# EAGLE board CAN2matrix (EAGLE 6.1)
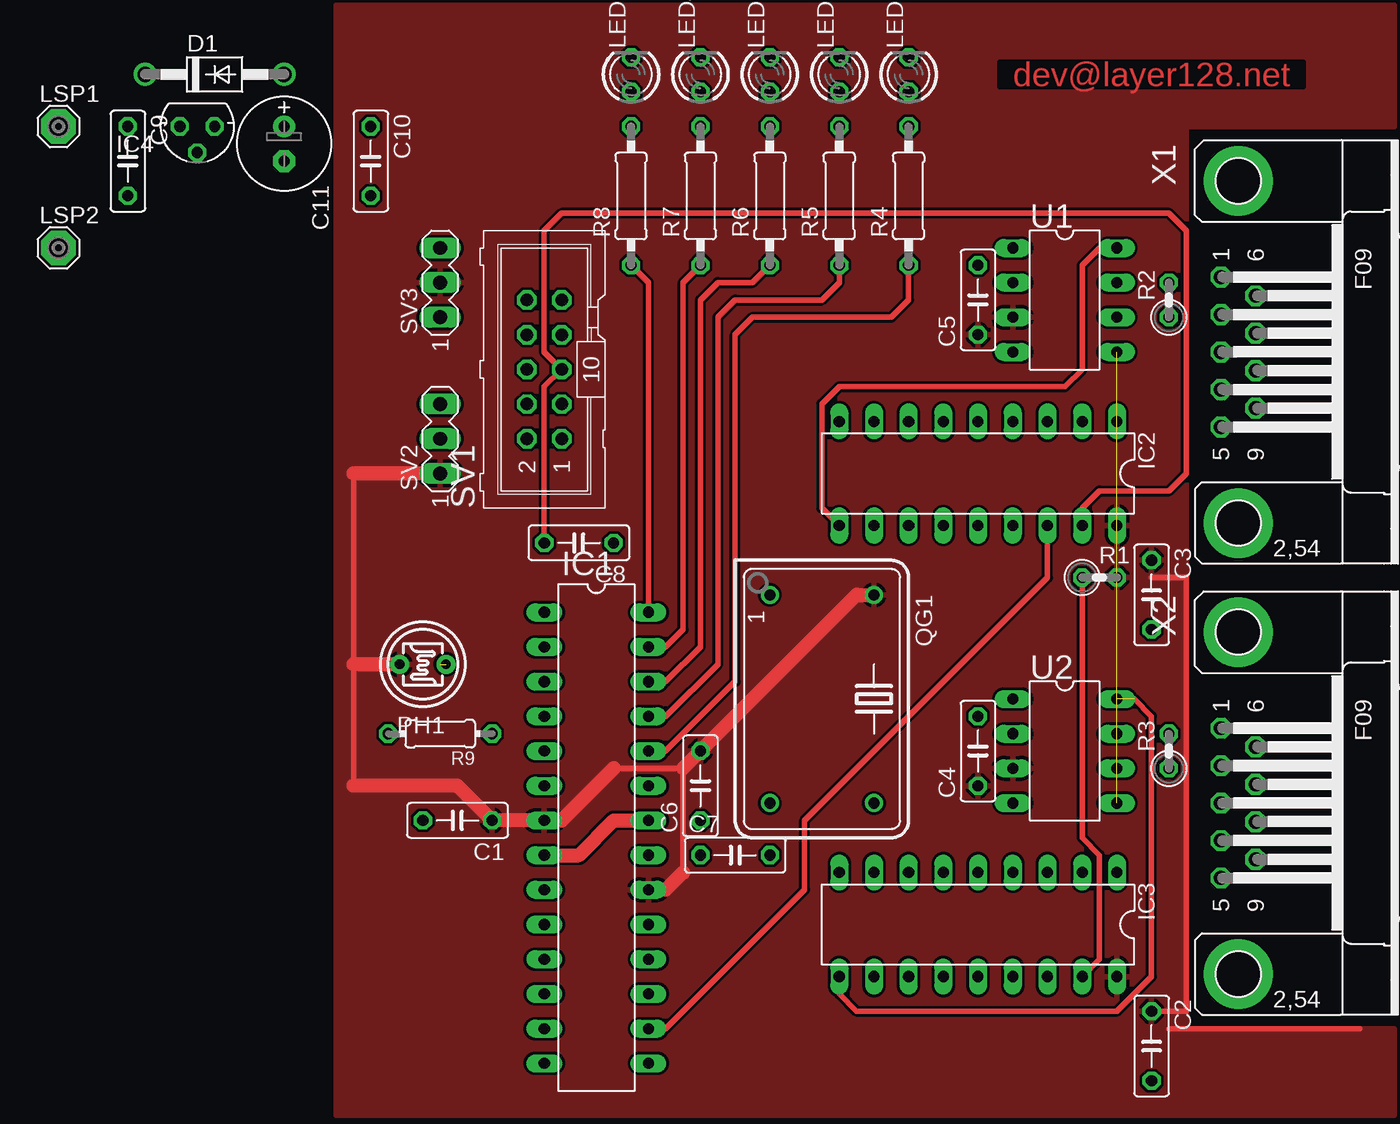
[diagram p0: board, top side]
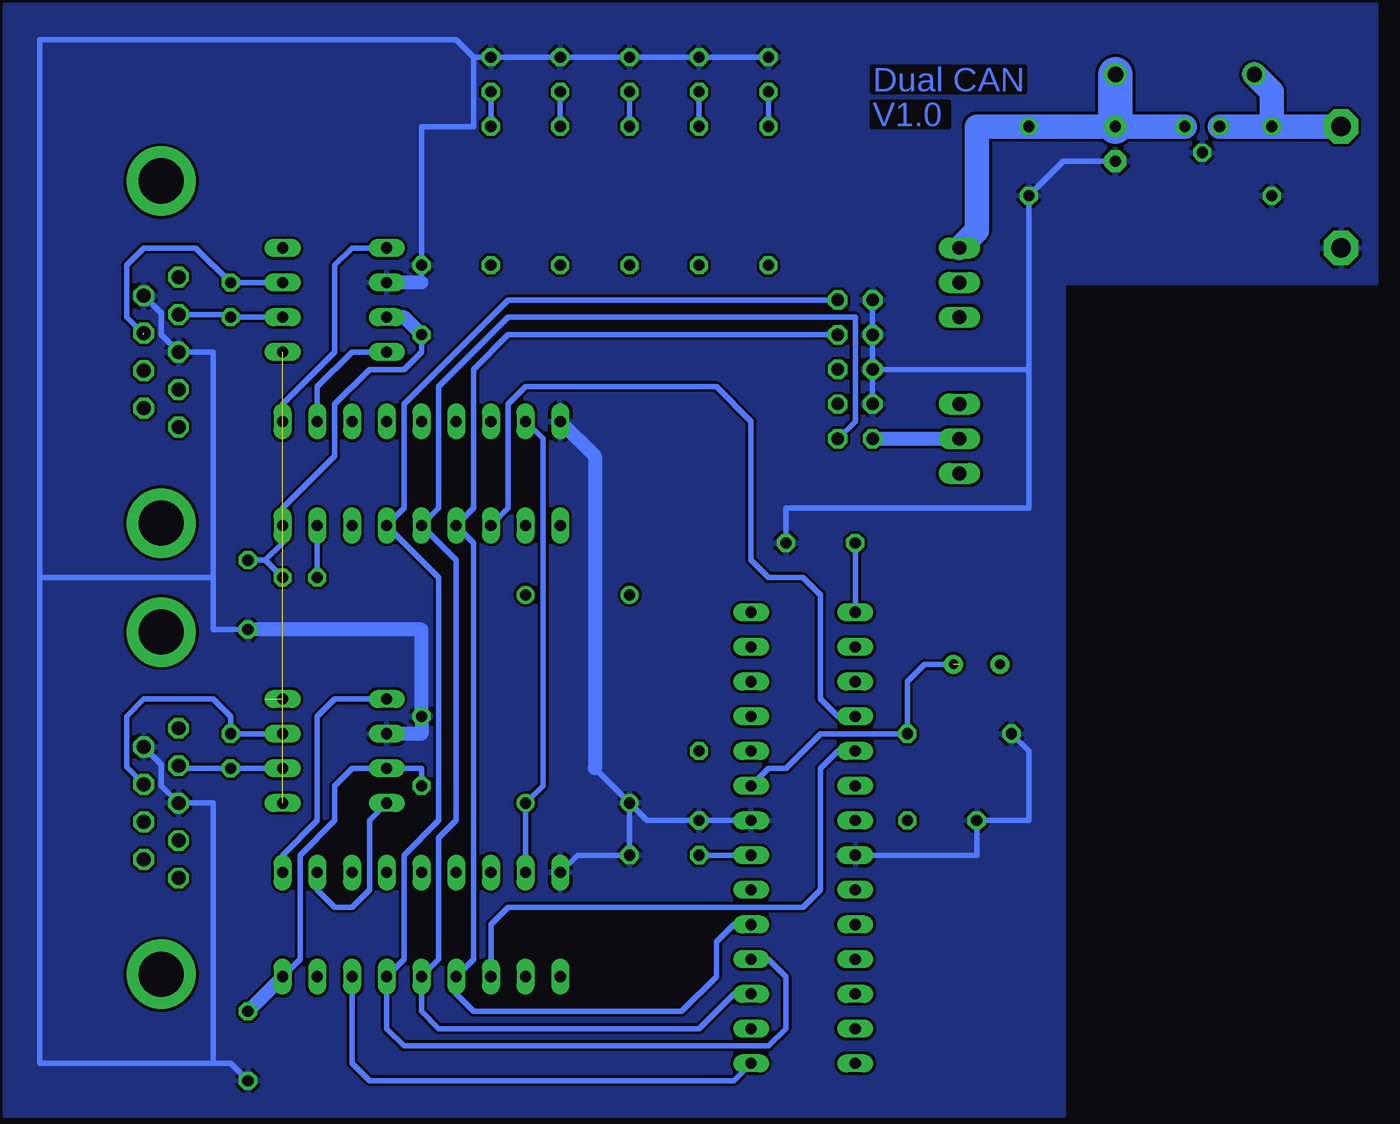
[diagram p1: board, bottom side, seen from below]

No outline drawn. Coordinates in mm, seen from the top.
Copper layers (1*16): Top 0.035mm / dielectric 1.5mm / Bottom 0.035mm
Design rules: minimum track width 10mil, minimum drill 24mil, track to track 8mil, track to pad 8mil, pad to pad 8mil, via to via 8mil, smd to smd 8mil, copper to edge 40mil, drill to drill 8mil, minimum pad ring 10mil, minimum via ring 8mil, stop-mask expansion 4mil, vias tented up to drill 0mil, thermal gap 10mil

## Footprints (pad centres in the part's own frame; a part is rotated, then mirrored left to right if it is on the bottom)
C050-025X075 = drill 0.813 octagon: 1 -2.54,0; 2 2.54,0
E2,5-7 = drill 0.813 pad 1.6: + -1.27,0 | drill 0.813 pad 1.6 octagon: - 1.27,0
DO41-10 = drill 1.118: A 5.08,0; C -5.08,0
DIL28-3 = drill 0.813 long: 1 -16.51,-3.81; 2 -13.97,-3.81; 3 -11.43,-3.81; 4 -8.89,-3.81; 5 -6.35,-3.81; 6 -3.81,-3.81; 7 -1.27,-3.81; 8 1.27,-3.81; 9 3.81,-3.81; 10 6.35,-3.81; 11 8.89,-3.81; 12 11.43,-3.81; 13 13.97,-3.81; 14 16.51,-3.81; 15 16.51,3.81; 16 13.97,3.81; 17 11.43,3.81; 18 8.89,3.81; 19 6.35,3.81; 20 3.81,3.81; 21 1.27,3.81; 22 -1.27,3.81; 23 -3.81,3.81; 24 -6.35,3.81; 25 -8.89,3.81; 26 -11.43,3.81; 27 -13.97,3.81; 28 -16.51,3.81
DIL18 = drill 0.813 long: 1 -10.16,-3.81; 2 -7.62,-3.81; 3 -5.08,-3.81; 4 -2.54,-3.81; 5 0,-3.81; 6 2.54,-3.81; 7 5.08,-3.81; 8 7.62,-3.81; 9 10.16,-3.81; 10 10.16,3.81; 11 7.62,3.81; 12 5.08,3.81; 13 2.54,3.81; 14 0,3.81; 15 -2.54,3.81; 16 -5.08,3.81; 17 -7.62,3.81; 18 -10.16,3.81
78LXX = drill 0.813 octagon: GND 0,1.905; IN 1.27,0; OUT -1.27,0
LED3MM = drill 0.813 octagon: A -1.27,0; K 1.27,0
SE14 = drill 1.397 pad 2.54 octagon: MP 0,0
T0-46-A10XX = drill 0.7 pad 1.4: 1 -1.7,0; 2 1.7,0
DIL14S = drill 0.813: 1 -7.62,-3.81; 7 7.62,-3.81; 8 7.62,3.81; 14 -7.62,3.81
0207/2V = drill 0.813 octagon: 1 -1.27,0; 2 1.27,0
0207/10 = drill 0.813 octagon: 1 -5.08,0; 2 5.08,0
0204/7 = drill 0.813 octagon: 1 -3.81,0; 2 3.81,0
ML10 = drill 0.914 octagon: 1 -5.08,-1.27; 2 -5.08,1.27; 3 -2.54,-1.27; 4 -2.54,1.27; 5 0,-1.27; 6 0,1.27; 7 2.54,-1.27; 8 2.54,1.27; 9 5.08,-1.27; 10 5.08,1.27
MA03-1 = drill 1.016 long: 1 -2.54,0; 2 0,0; 3 2.54,0
DIL8 = drill 0.813 long: 1 -3.81,-3.81; 2 -1.27,-3.81; 3 1.27,-3.81; 4 3.81,-3.81; 5 3.81,3.81; 6 1.27,3.81; 7 -1.27,3.81; 8 -3.81,3.81
F09HP = drill 1.016 octagon: 1 -5.486,-1.27; 2 -2.743,-1.27; 3 0,-1.27; 4 2.743,-1.27; 5 5.486,-1.27; 6 -4.115,1.27; 7 -1.372,1.27; 8 1.372,1.27; 9 4.115,1.27 | drill 3.302 pad 5.08: G1 -12.522,0; G2 12.522,0

## Placement (x,y rotation side)
C1  100n  [C050-025X075]  31.75,21.59 180 top
C2  100n  [C050-025X075]  82.55,5.08 270 top
C3  100n  [C050-025X075]  82.55,38.1 270 top
C4  100n  [C050-025X075]  69.85,26.67 90 top
C5  100n  [C050-025X075]  69.85,59.69 90 top
C6  100n  [C050-025X075]  49.53,24.13 90 top
C7  100n  [C050-025X075]  52.07,19.05 0 top
C8  47n  [C050-025X075]  40.64,41.91 180 top
C9  330n  [C050-025X075]  7.62,69.85 270 top
C10  100n  [C050-025X075]  25.4,69.85 270 top
C11  1µ  [E2,5-7]  19.05,71.12 270 top
D1  1N4002  [DO41-10]  13.97,76.2 0 top
IC1  MEGA8-P  [DIL28-3]  41.91,20.32 270 top
IC2  MCP2515-E/P  [DIL18]  69.85,46.99 180 top
IC3  MCP2515-E/P  [DIL18]  69.85,13.97 180 top
IC4  [78LXX]  12.7,72.39 180 top
LED1  red  [LED3MM]  64.77,76.2 90 top
LED2  red  [LED3MM]  59.69,76.2 90 top
LED3  green  [LED3MM]  54.61,76.2 90 top
LED4  green  [LED3MM]  49.53,76.2 90 top
LED5  yellow  [LED3MM]  44.45,76.2 90 top
LSP1  +12V  [SE14]  2.54,72.39 0 top
LSP2  SE14  [SE14]  2.54,63.5 0 top
PH1  A1050_09  [T0-46-A10XX]  29.21,33.02 0 top
QG1  4.0000Mhz  [DIL14S]  58.42,30.48 270 top
R1  10k  [0207/2V]  78.74,39.37 0 top
R2  120  [0207/2V]  83.82,59.69 90 top
R3  120  [0207/2V]  83.82,26.67 90 top
R4  1k  [0207/10]  64.77,67.31 90 top
R5  1k  [0207/10]  59.69,67.31 90 top
R6  1k  [0207/10]  54.61,67.31 90 top
R7  1k  [0207/10]  49.53,67.31 90 top
R8  1k  [0207/10]  44.45,67.31 90 top
R9  39k  [0204/7]  30.48,27.94 180 top
SV1  ISP (WSL10G)  [ML10]  38.1,54.61 90 top
SV2  USB Pwr  [MA03-1]  30.48,49.53 90 top
SV3  Ext Pwr  [MA03-1]  30.48,60.96 90 top
U1  MCP2551P  [DIL8]  76.2,59.69 270 top
U2  MCP2551P  [DIL8]  76.2,26.67 270 top
X1  CAN1  [F09HP]  88.9,55.88 270 top
X2  CAN2  [F09HP]  88.9,22.86 270 top

## Library data of the parts
C1-C11 R1-R9 = resistor
D1 = diode
IC1 = atmel; OC_FARNELL: unknown; OC_NEWARK: unknown
IC2 IC3 = mcp2515
IC4 = v-reg
LED1-LED5 = led
LSP1 LSP2 = solpad
PH1 = photo-elements
QG1 = crystal; OC_FARNELL: unknown; OC_NEWARK: unknown
SV1 = con-ml; OC_FARNELL: unknown; OC_NEWARK: unknown
SV2 SV3 = con-lstb; OC_FARNELL: unknown; OC_NEWARK: unknown
U1 U2 = microchip_can
X1 X2 = con-subd; OC_FARNELL: unknown; OC_NEWARK: unknown

## Nets
+5V: C1.1 C2.1 C3.1 C4.1 C5.1 C6.2 IC1.7 IC1.20 IC2.18 IC3.18 PH1.1 QG1.14 R1.2 SV2.1 SV3.2 U1.3 U2.3
+12V: C9.1 D1.C IC4.IN LSP1.MP
GND: C1.2 C2.2 C3.2 C4.2 C5.2 C6.1 C7.2 C8.1 C9.2 C10.2 C11.- IC1.8 IC1.22 IC2.9 IC3.9 IC4.GND LED1.K LED2.K LED3.K LED4.K LED5.K LSP2.MP QG1.7 R9.2 SV1.4 SV1.6 SV1.8 SV1.10 U1.2 U2.2 X1.3 X1.6 X2.3 X2.6
N$1: IC1.18 IC2.15 IC3.15 SV1.9
N$2: IC1.17 IC2.14 IC3.14 SV1.1
N$3: IC1.19 IC2.13 IC3.13 SV1.7
N$4: R2.2 U1.7 X1.7
N$5: R3.2 U2.7 X2.7
N$6: R3.1 U2.6 X2.2
N$7: IC3.10 U2.8
N$8: C7.1 IC1.21
N$9: C8.2 IC1.1 IC2.17 IC3.17 R1.1 SV1.5
N$10: IC2.1 U1.1
N$11: IC2.2 U1.4
N$12: IC3.1 U2.1
N$13: IC3.2 U2.4
N$14: IC1.16 IC2.16
N$15: IC1.15 IC3.16
N$16: IC1.4 IC2.12
N$17: IC1.5 IC3.12
N$18: IC2.8 IC3.8 QG1.8
N$19: IC2.10 U1.8
N$20: R2.1 U1.6 X1.2
N$21: SV1.2 SV2.2
N$22: IC1.24 R4.1
N$23: IC1.25 R5.1
N$24: IC1.26 R6.1
N$25: IC1.27 R7.1
N$26: IC1.28 R8.1
N$27: LED1.A R4.2
N$28: LED2.A R5.2
N$29: LED3.A R6.2
N$30: LED4.A R7.2
N$31: LED5.A R8.2
N$32: IC1.23 PH1.2 R9.1
N$33: C10.1 C11.+ D1.A IC4.OUT SV3.3
VREF: U1.5 U2.5

## Tracks (layer width: path | path; a pad name or v marks a point on that pad's centre or on a via)
+5V
  Top 0.406: IC1.7 39.37,21.59 | 43.18,25.4 48.26,25.4 48.26,17.78 | 97.79,6.35 83.82,6.35 | 24.13,24.13 24.13,33.02 24.13,46.99 | C2.1 85.09,7.62 85.09,39.37 82.55,39.37
  Top 1.016: 39.37,21.59 43.18,25.4 | 48.26,25.4 C6.2 60.96,38.1 QG1.14 | 48.26,17.78 46.99,16.51 IC1.20 | PH1.1 24.13,33.02 | SV2.1 24.13,46.99 | IC1.7 C1.1 31.75,24.13 24.13,24.13
  Bottom 0.406: C4.1 69.85,25.4 U2.3 74.93,25.4 76.2,24.13 76.2,21.59 78.74,19.05 78.74,11.43 IC3.18 | R1.2 81.28,40.64 | C3.1 81.28,40.64 | 81.28,40.64 80.01,41.91 IC2.18 80.01,44.45 76.2,48.26 76.2,52.07 73.66,54.61 71.12,54.61 69.85,55.88 C5.1
  Bottom 1.016: C2.1 IC3.18 | C5.1 71.12,58.42 U1.3
  pour Top: 22.86,0 22.86,81.28 100.33,81.28 100.33,72.39 85.09,72.39 85.09,6.35 100.33,6.35 100.33,0
+12V
  Bottom 1.778: LSP1.MP C9.1 | C9.1 7.62,74.93 D1.C | C9.1 IC4.IN
GND
  Top 1.016: IC1.8 40.64,19.05 43.18,21.59 IC1.22
  Bottom 0.406: IC1.22 C6.1 53.34,21.59 QG1.7 | X2.6 88.9,25.7 88.9,24.13 X2.3 85.09,22.86 85.09,3.81 | X1.6 88.9,58.73 88.9,57.15 X1.3 85.09,55.88 85.09,39.37 | 69.85,60.96 C5.2 69.85,72.39 66.04,72.39 66.04,77.47 | SV1.10 SV1.8 SV1.6 | 25.4,54.61 25.4,44.45 43.18,44.45 C8.1 | 25.4,54.61 SV1.6 | SV1.6 SV1.4 | IC1.8 29.21,19.05 C1.2 25.4,21.59 25.4,26.67 R9.2 | IC3.9 58.42,19.05 C7.2 QG1.7 | C2.2 83.82,3.81 85.09,3.81 | 85.09,3.81 97.79,3.81 97.79,39.37 | LED5.K LED4.K LED3.K LED2.K LED1.K 66.04,77.47 | 66.04,77.47 67.31,78.74 97.79,78.74 97.79,39.37 | 57.15,25.4 QG1.7 | 25.4,54.61 C10.2 22.86,69.85 C11.- | 85.09,39.37 97.79,39.37 | C3.2 85.09,35.56 85.09,39.37
  Bottom 1.016: 69.85,60.96 U1.2 | U2.2 69.85,27.94 C4.2 69.85,35.56 C3.2 | IC2.9 57.15,48.26 57.15,25.4
  pour Bottom: 22.86,81.28 22.86,0 100.33,0 100.33,81.28
  pour Bottom: 0,60.96 0,81.28 22.86,81.28 22.86,60.96
N$1
  Bottom 0.406: SV1.9 63.5,59.69 71.12,52.07 71.12,44.45 IC2.15 68.58,39.37 68.58,21.59 71.12,19.05 71.12,11.43 IC3.15 72.39,6.35 71.12,5.08 44.45,5.08 43.18,6.35 43.18,10.16 44.45,11.43 IC1.18
N$2
  Bottom 0.406: SV1.1 38.1,50.8 38.1,58.42 63.5,58.42 68.58,53.34 68.58,44.45 IC2.14 67.31,40.64 67.31,21.59 68.58,20.32 68.58,11.43 IC3.14 69.85,7.62 68.58,6.35 49.53,6.35 46.99,8.89 IC1.17
N$3
  Bottom 0.406: SV1.7 63.5,57.15 66.04,54.61 66.04,44.45 IC2.13 66.04,41.91 66.04,11.43 IC3.13 67.31,8.89 66.04,7.62 50.8,7.62 48.26,10.16 48.26,12.7 46.99,13.97 IC1.19
N$4  (1 unrouted)
  Bottom 0.406: U1.7 R2.2 86.36,63.5 90.17,63.5 91.44,62.23 91.44,58.42 90.17,57.15
N$5
  Bottom 0.406: U2.7 R3.2 83.82,29.21 85.09,30.48 90.17,30.48 91.44,29.21 91.44,25.5 X2.7
N$6
  Bottom 0.406: U2.6 R3.1 87.63,25.4 X2.2
N$7  (1 unrouted)
  Top 0.406: IC3.10 59.69,8.89 60.96,7.62 80.01,7.62 82.55,10.16 82.55,29.21 81.28,30.48
N$8
  Bottom 0.406: IC1.21 C7.1
N$9
  Top 0.406: C8.2 38.1,53.34 SV1.5 38.1,55.88 38.1,64.77 39.37,66.04 83.82,66.04 85.09,64.77 85.09,46.99 83.82,45.72 78.74,45.72 77.47,44.45 IC2.17 | IC3.17 78.74,11.43 78.74,19.05 77.47,20.32 R1.1
  Bottom 0.406: C8.2 IC1.1 | R1.1 IC2.17
N$10
  Bottom 0.406: IC2.1 80.01,52.07 76.2,55.88 76.2,62.23 74.93,63.5 U1.1
N$11
  Bottom 0.406: U1.4 74.93,55.88 77.47,53.34 IC2.2
N$12
  Bottom 0.406: IC3.1 80.01,19.05 77.47,21.59 77.47,29.21 76.2,30.48 U2.1
N$13
  Bottom 0.406: U2.4 73.66,21.59 73.66,16.51 74.93,15.24 76.2,15.24 77.47,16.51 IC3.2
N$14
  Top 0.406: IC1.16 46.99,6.35 57.15,16.51 57.15,21.59 74.93,39.37 IC2.16
N$15
  Bottom 0.406: IC1.15 46.99,2.54 73.66,2.54 74.93,3.81 IC3.16
N$16
  Bottom 0.406: IC1.4 39.37,29.21 40.64,30.48 40.64,38.1 41.91,39.37 44.45,39.37 45.72,40.64 45.72,50.8 48.26,53.34 62.23,53.34 63.5,52.07 63.5,44.45 IC2.12
N$17
  Bottom 0.406: IC1.5 39.37,26.67 40.64,25.4 40.64,16.51 41.91,15.24 63.5,15.24 64.77,13.97 IC3.12
N$18
  Bottom 0.406: IC3.8 QG1.8 60.96,24.13 60.96,49.53 IC2.8
N$19
  Top 0.406: IC2.10 58.42,44.45 58.42,52.07 59.69,53.34 76.2,53.34 77.47,54.61 77.47,62.23 78.74,63.5 U1.8
N$20
  Bottom 0.406: U1.6 R2.1 84.02,58.62 X1.2
N$21
  Bottom 1.016: SV1.2 SV2.2
N$22
  Top 0.406: IC1.24 46.99,26.67 52.07,31.75 52.07,57.15 53.34,58.42 63.5,58.42 64.77,59.69 R4.1
N$23
  Top 0.406: IC1.25 46.99,29.21 50.8,33.02 50.8,58.42 52.07,59.69 58.42,59.69 59.69,60.96 R5.1
N$24
  Top 0.406: IC1.26 46.99,31.75 49.53,34.29 49.53,59.69 50.8,60.96 53.34,60.96 R6.1
N$25
  Top 0.406: IC1.27 46.99,34.29 48.26,35.56 48.26,60.96 R7.1
N$26
  Top 0.406: IC1.28 45.72,60.96 R8.1
N$27
  Bottom 0.406: LED1.A R4.2
N$28
  Bottom 0.406: LED2.A R5.2
N$29
  Bottom 0.406: LED3.A R6.2
N$30
  Bottom 0.406: LED4.A R7.2
N$31
  Bottom 0.406: LED5.A R8.2
N$32  (1 unrouted)
  Bottom 0.406: IC1.23 44.45,25.4 43.18,25.4 40.64,27.94 R9.1 34.29,31.75 33.02,33.02 30.48,33.02
N$33
  Bottom 1.778: IC4.OUT C11.+ C10.1 29.21,72.39 29.21,64.77 SV3.3
  Bottom 2.54: D1.A C11.+
VREF  (1 unrouted)

## Text on the board
Top: dev@layer128.net
Bottom: Dual CAN | V1.0